# EAGLE board 1_axis_stepper_driver_teensy v71 (EAGLE 9.7.0)
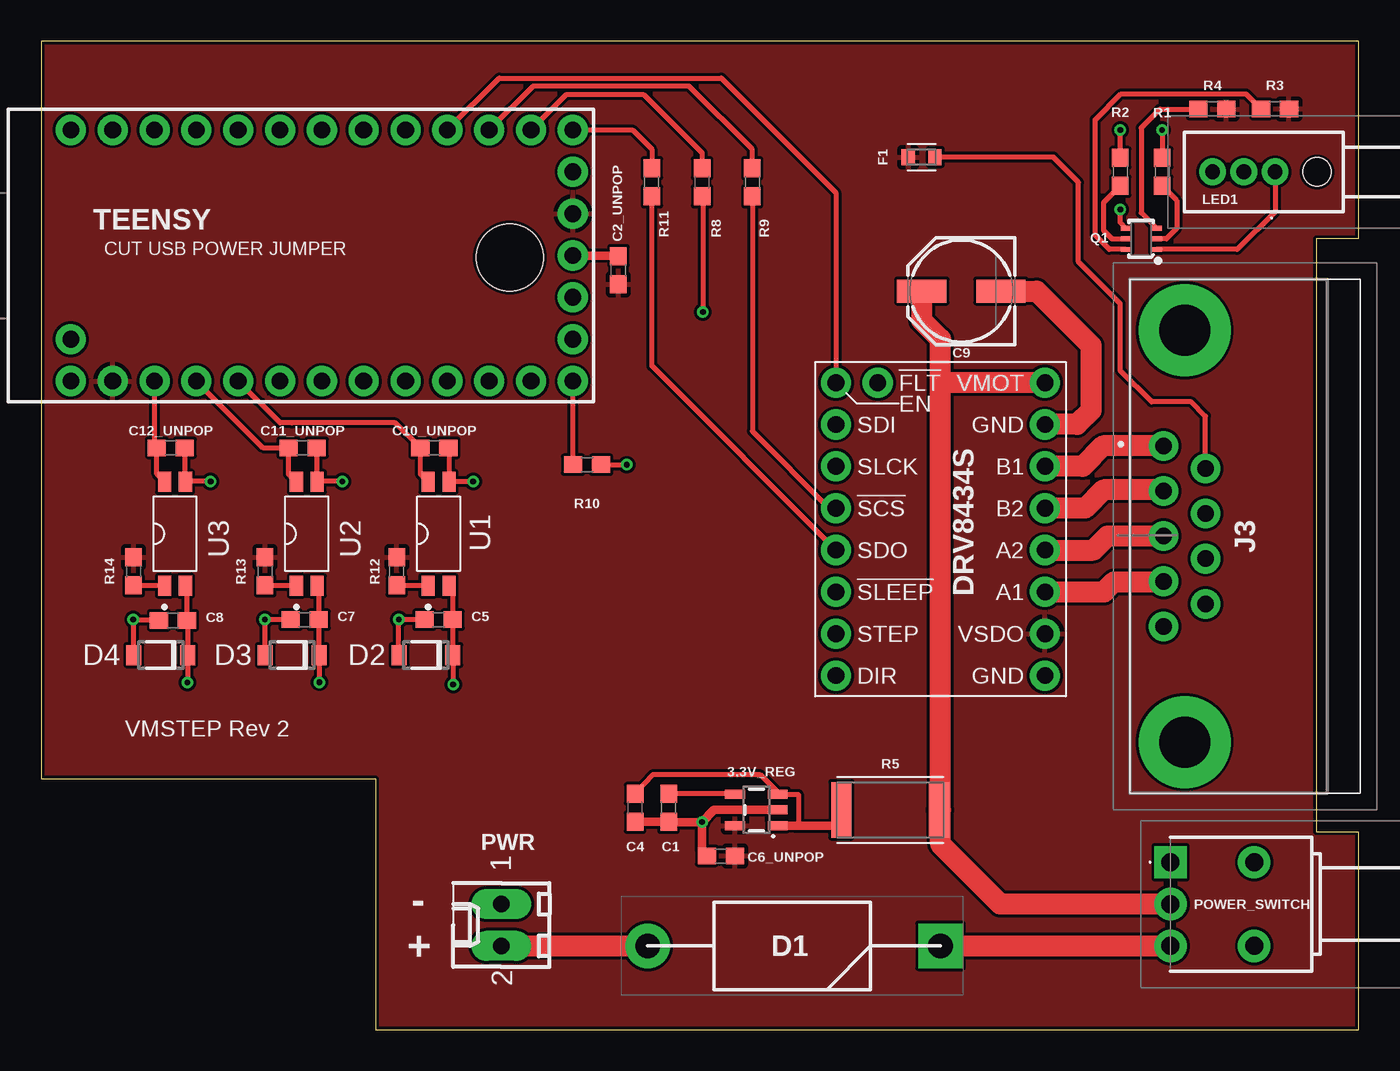
[diagram p0: board, top side]
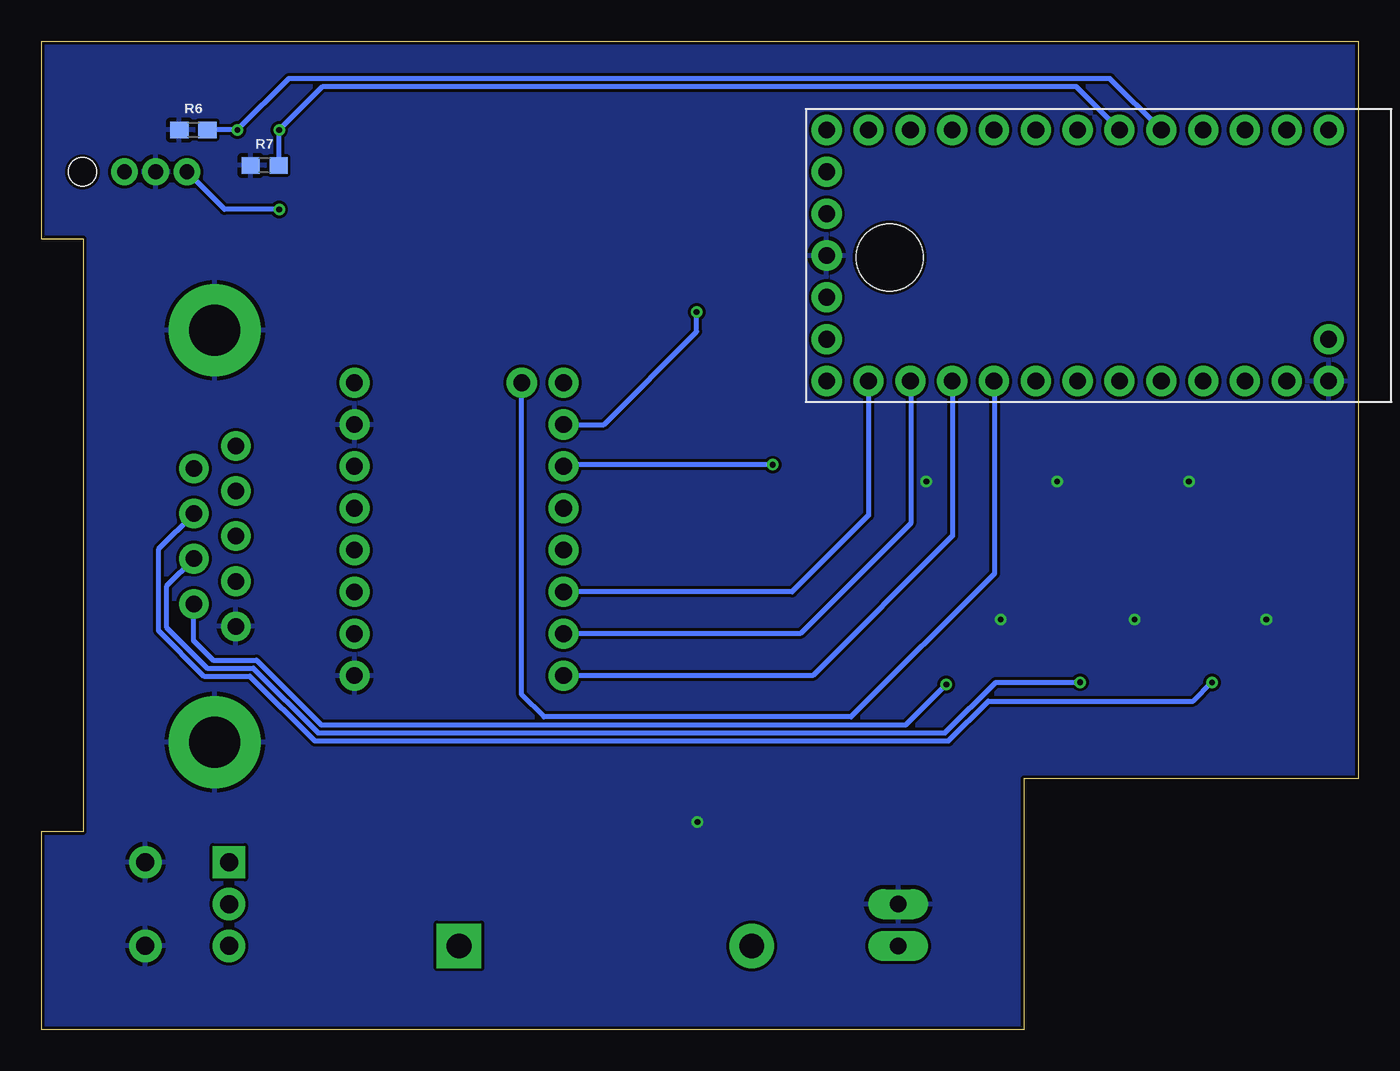
[diagram p1: board, bottom side, seen from below]

Size 79.98 x 60 mm. Coordinates in mm from the lower left corner, seen from the top.
Outline: 0,60 0,15.24 20.32,15.24 20.32,0 79.98,0 79.98,12 77.44,12 77.44,48 79.98,48 79.98,60 0,60
Copper layers (1*16): Top 0.035mm / dielectric 1.6mm / Bottom 0.035mm
Design rules "jlcpcb-2layers": minimum track width 5mil, minimum drill 0.3mm, track to track 5mil, track to pad 5mil, pad to pad 5mil, via to via 5mil, smd to smd 5mil, copper to edge 0.2mm, drill to drill 6mil, minimum pad ring 10mil, minimum via ring 3mil, stop-mask expansion 4mil, vias tented up to drill 0mil, thermal gap 10mil
Net classes: 0 default: clearance 0.178 mm; 1 Power: width 0.305 mm, clearance 0.406 mm; 2 Logic Power: clearance 0.178 mm
Holes 4.06 mm at 28.45,46.86

## Footprints (pad centres in the part's own frame; a part is rotated, then mirrored left to right if it is on the bottom)
SOT23-5 = smd 0.55 x 1.2: 1 -0.95,-1.3; 2 0,-1.3; 3 0.95,-1.3; 4 0.95,1.3; 5 -0.95,1.3
0603 = smd 1.1 x 1: 1 -0.85,0; 2 0.85,0
PANASONIC_D = smd 3 x 1.4: + 2.4,0; - -2.4,0
DIOAD3070W130L950D530 = drill 1.5 pad 2.25 square: 1 0,0 | drill 1.5 pad 2.25: 2 17.78,0
SOD123FL = smd 0.91 x 1.22: A 1.625,0; C -1.625,0
DRV8434S = drill 1.016: 1 -6.35,8.89; 2 -6.35,6.35; 3 -6.35,3.81; 4 -6.35,1.27; 5 -6.35,-1.27; 6 -6.35,-3.81; 7 -6.35,-6.35; 8 -6.35,-8.89; 9 6.35,-8.89; 10 6.35,-6.35; 11 6.35,-3.81; 12 6.35,-1.27; 13 6.35,1.27; 14 6.35,3.81; 15 6.35,6.35; 16 6.35,8.89; 17 -3.81,8.89
FUSC1608X60N = smd 0.799 x 0.974: 1 -0.815,0; 2 0.815,0
09661526615 = drill 1 pad 1.5: 1 0,0; 2 -2.74,0; 3 -5.48,0; 4 -8.22,0; 5 -10.96,0; 6 -1.37,-2.54; 7 -4.11,-2.54; 8 -6.85,-2.54; 9 -9.59,-2.54 | drill 3.1 pad 4.65: MH1 7.02,-1.27; MH2 -17.98,-1.27
WP42WUMEGW = drill 0.9 pad 1.4: 1 0,0; 2 -1.9,0; 3 -3.8,0 | hole 1.7: 2.54,0
200MSP1T2B2M6RE = drill 1.09 pad 1.635 square: 1 0,0 | drill 1.09 pad 1.635: 2 0,2.54; 3 0,5.08; MH1 -5.08,0; MH2 -5.08,5.08
6410-02 = drill 1.016 long: 1 1.27,0; 2 -1.27,0
SC70-6 = smd 0.3 x 0.66: 1 -0.65,-0.92; 2 0,-0.92; 3 0.65,-0.92; 4 0.65,0.92; 5 0,0.92; 6 -0.65,0.92
RESC6332X71 = smd 1.231 x 3.37: 1 -2.97,0; 2 2.97,0
TEENSY4.0_MIRROR = drill 1.016 pad 1.676: 0 7.62,13.97; 1 7.62,11.43; 2 7.62,8.89; 3 7.62,6.35; 3.3V 2.54,-16.51; 3.3V1 -7.62,11.43; 4 7.62,3.81; 5 7.62,1.27; 6 7.62,-1.27; 7 7.62,-3.81; 8 7.62,-6.35; 9 7.62,-8.89; 10 7.62,-11.43; 11 7.62,-13.97; 12 7.62,-16.51; 13 -7.62,-16.51; 14 -7.62,-13.97; 15 -7.62,-11.43; 16 -7.62,-8.89; 17 -7.62,-6.35; 18 -7.62,-3.81; 19 -7.62,-1.27; 20 -7.62,1.27; 21 -7.62,3.81; 22 -7.62,6.35; 23 -7.62,8.89; GND 0,-16.51; GND2 -7.62,13.97; ON-OFF -5.08,-16.51; PROG -2.54,-16.51; VBAT 5.08,-16.51; VUSB -5.08,13.97
TLP291(GR-TP,SE = smd 1.2 x 0.8: 1 -3.15,0.635; 2 -3.15,-0.635; 3 3.15,-0.635; 4 3.15,0.635

## Placement (x,y rotation side)
3.3V_REG  SPX3819M5_3_3  [SOT23-5]  43.43,13.34 90 top
C1  0.01uf  [0603]  38.1,13.46 270 top
C2_UNPOP  0.1uF  [0603]  35.05,46.1 90 top
C4  0.1uF  [0603]  36.07,13.46 270 top
C5  0.1uF  [0603]  24.13,24.89 180 top
C6_UNPOP  4.7uF  [0603]  41.27,10.54 180 top
C7  0.1uF  [0603]  16,24.89 180 top
C8  0.1uF  [0603]  8,24.84 180 top
C9  47UF-POLAR  [PANASONIC_D]  55.88,44.83 180 top
C10_UNPOP  0.1uF  [0603]  23.88,35.31 0 top
C11_UNPOP  0.1uF  [0603]  15.88,35.31 0 top
C12_UNPOP  0.1uF  [0603]  7.87,35.31 0 top
D1  1N5822  [DIOAD3070W130L950D530]  54.61,5.08 180 top
D2  SMF3.3  [SOD123FL]  23.37,22.73 180 top
D3  SMF3.3  [SOD123FL]  15.24,22.73 180 top
D4  SMF3.3  [SOD123FL]  7.26,22.73 180 top
DRV8434S  3766-DRV8434S  [DRV8434S]  54.61,30.38 0 top
F1  500  [FUSC1608X60N]  53.47,52.96 180 top
J3  09661526615  [09661526615]  68.17,35.43 90 top
LED1  WP42WUM_EGW  [WP42WUMEGW]  74.93,52.07 0 top
POWER_SWITCH  200MSP1T2B2M6RE  [200MSP1T2B2M6RE]  68.58,10.16 180 top
PWR  22-27-2021-02  [6410-02]  27.94,6.35 90 top
Q1  [SC70-6]  66.8,48.01 90 top
R1  10k  [0603]  68.07,52.07 270 top
R2  10k  [0603]  65.53,52.07 270 top
R3  220  [0603]  74.92,55.89 0 top
R4  220  [0603]  71.12,55.88 0 top
R5  68  [RESC6332X71]  51.56,13.34 180 top
R6  100k  [0603]  70.74,54.61 0 bottom
R7  100k  [0603]  66.42,52.45 0 bottom
R8  68  [0603]  40.13,51.44 270 top
R9  68  [0603]  43.18,51.44 270 top
R10  68  [0603]  33.15,34.29 180 top
R11  68  [0603]  37.08,51.44 90 top
R12  220  [0603]  21.59,27.81 270 top
R13  220  [0603]  13.59,27.81 270 top
R14  220  [0603]  5.61,27.81 270 top
TEENSY  TEENSY4.0TEENSY4.0_MIRROR  [TEENSY4.0_MIRROR]  15.77,46.99 90 top
U1  TLP291(GR-TP,SE  [TLP291(GR-TP,SE]  24.13,30.1 90 top
U2  TLP291(GR-TP,SE  [TLP291(GR-TP,SE]  16.13,30.1 90 top
U3  TLP291(GR-TP,SE  [TLP291(GR-TP,SE]  8.13,30.1 90 top

## Library data of the parts
3.3V_REG = SparkFun-IC-Power; PROD_ID: VREG-13321
C1 C2_UNPOP C4 C5 C7 C8 C10_UNPOP C11_UNPOP C12_UNPOP = SparkFun-Capacitors; PROD_ID: CAP-08390
C6_UNPOP = SparkFun-Capacitors; PROD_ID: CAP-14106
C9 = SparkFun-Capacitors; PROD_ID: CAP-10547
D1 = 1N5822; DESCRIPTION: Schottky Diodes; HEIGHT: mm; MANUFACTURER_NAME: STMicroelectronics; MANUFACTURER_PART_NUMBER: 1N5822; MOUSER_PART_NUMBER: 511-1N5822; MOUSER_PRICE-STOCK: https://www.mouser.co.uk/ProductDetail/STMicroelectronics/1N5822?qs=JV7lzlMm3yJ50hlrGV6%252BnQ%3D%3D
D2-D4 = diode
DRV8434S = pololu-stepper-driver
F1 = Circuit-Protection; CATEGORY: Circuit-Protection; SUB-CATEGORY: Fuse
J3 = 09661526615; DESCRIPTION: D-Sub 9pin female low profile angled, 2.54mm pitch, stamped, with board locks, M3, PL2; HEIGHT: 12.5mm; MANUFACTURER_NAME: HARTING; MANUFACTURER_PART_NUMBER: 09661526615; MOUSER_PART_NUMBER: 617-09661526615; MOUSER_PRICE-STOCK: https://www.mouser.co.uk/ProductDetail/HARTING/09661526615?qs=vMzbrHvTwPGeGx6%252Be%2Fu2sw%3D%3D
LED1 = WP42WUM_EGW; DESCRIPTION: LED Circuit Board Indicators Red Grn 625 568nm White Diffused; HEIGHT: 7.36mm; MANUFACTURER_NAME: Kingbright; MANUFACTURER_PART_NUMBER: WP42WUM/EGW; MOUSER_PART_NUMBER: 604-WP42WUM/EGW; MOUSER_PRICE-STOCK: https://www.mouser.co.uk/ProductDetail/Kingbright/WP42WUM-EGW?qs=58z0TXQGVSSWjxfnBzIG6A%3D%3D
POWER_SWITCH = 200MSP1T2B2M6RE; DESCRIPTION: TOGGLE, 0.4VA, 20VAC/VDC SPDT, On-On Through Hole, Right Angle; HEIGHT: 6.35mm; MANUFACTURER_NAME: E-Switch; MANUFACTURER_PART_NUMBER: 200MSP1T2B2M6RE; MOUSER_PART_NUMBER: 612-200-A2262; MOUSER_PRICE-STOCK: https://www.mouser.co.uk/ProductDetail/E-Switch/200MSP1T2B2M6RE?qs=7Bi7Dg8SEnwpN43jZS7hJQ%3D%3D
PWR = con-molex; MF: MOLEX; OC_FARNELL: unknown; OC_NEWARK: unknown
Q1 = SparkFun-DiscreteSemi; PROD_ID: TRANS-13337
R1 R2 R6-R14 = SparkFun-Resistors; PROD_ID: RES-00824
R3 R4 = SparkFun-Resistors; PROD_ID: RES-07861
R5 = Resistor; CATEGORY: Resistor; SUB-CATEGORY: Fixed
TEENSY = SparkFun-Boards
U1-U3 = OPTOISOLATOR; CREATED_BY: PCBLayout.com; DIGIKEY_PART_NUMBER: TLP291(GR-TPSECT-ND; MANUFACTURER: Toshiba Semiconductor and Storage; MPN: TLP291(GR-TP,SE; PACKAGE: 4-SO

## Nets
5V [Logic Power]: 3.3V_REG.1 3.3V_REG.3 C4.1 R5.2
+12V [Power]: C9.+ DRV8434S.16 POWER_SWITCH.2 R5.1
A1 [Power]: DRV8434S.11 J3.4
A2 [Power]: DRV8434S.12 J3.3
B1 [Power]: DRV8434S.14 J3.1
B2 [Power]: DRV8434S.13 J3.2
DCIN [Power]: D1.2 PWR.2
DCSAFE [Power]: D1.1 POWER_SWITCH.3
DIR: DRV8434S.8 TEENSY.16
ENABLE: DRV8434S.1 TEENSY.9
FAULT: DRV8434S.17 TEENSY.17
GND [Logic Power]: 3.3V_REG.2 C1.2 C2_UNPOP.2 C4.2 C5.2 C6_UNPOP.2 C7.2 C8.2 C9.- C10_UNPOP.2 C11_UNPOP.2 C12_UNPOP.2 D2.A D3.A D4.A DRV8434S.9 DRV8434S.15 J3.5 J3.MH1 J3.MH2 LED1.2 POWER_SWITCH.MH1 POWER_SWITCH.MH2 PWR.1 R6.1 R7.1 TEENSY.GND TEENSY.GND2 U1.3 U2.3 U3.3
HOME: C10_UNPOP.1 TEENSY.21 U1.4
HOME_INPUT: C5.1 D2.C J3.9 U1.2
LED_G: R2.1 R7.2 TEENSY.5
LED_R: R1.1 R6.2 TEENSY.4
LIM1: C12_UNPOP.1 TEENSY.23 U3.4
LIM1_INPUT: C8.1 D4.C J3.7 U3.2
LIM2: C11_UNPOP.1 TEENSY.22 U2.4
LIM2_INPUT: C7.1 D3.C J3.8 U2.2
LOGIC [Logic Power]: 3.3V_REG.5 C2_UNPOP.1 C6_UNPOP.1 DRV8434S.10 F1.2 R3.2 R4.2 R12.1 R13.1 R14.1 TEENSY.3.3V TEENSY.3.3V1
MISO: R11.2 TEENSY.12
MOSI: DRV8434S.2 R8.2
N$1: Q1.6 R3.1
N$2: LED1.1 Q1.1
N$3: Q1.2 R1.2
N$4: Q1.5 R2.2
N$5: Q1.3 R4.1
N$6: LED1.3 Q1.4
N$7 [Logic Power]: F1.1 J3.6
N$8: 3.3V_REG.4 C1.1
N$9: R8.1 TEENSY.11
N$10: R9.1 TEENSY.10
N$11: R10.2 TEENSY.13
N$12: DRV8434S.5 R11.1
N$13: R12.2 U1.1
N$14: R13.2 U2.1
N$15: R14.2 U3.1
SCLK: DRV8434S.3 R10.1
SCS: DRV8434S.4 R9.2
SLEEP: DRV8434S.6 TEENSY.14
STEP: DRV8434S.7 TEENSY.15
VBAT: TEENSY.VBAT
VUSB: TEENSY.VUSB

## Tracks (layer width: path | path; a pad name or v marks a point on that pad's centre or on a via)
5V
  Top 0.305: C4.1 37.18,15.5 43.65,15.5 44.73,14.41 3.3V_REG.3 45.97,14.29 45.97,12.38 | 48.59,12.38 R5.2
  Top 0.508: 3.3V_REG.1 45.72,12.38 45.97,12.38 48.59,12.38
+12V
  Top 1.27: DRV8434S.16 54.71,39.27 54.61,39.37 | 54.61,13.34 54.61,11.26 58.24,7.62 POWER_SWITCH.2 | 54.61,13.34 54.61,39.37 | 54.61,39.37 54.61,41.91 53.48,43.04 C9.+ | R5.1 54.61,13.34
A1
  Top 1.27: DRV8434S.11 64.54,26.57 65.15,27.18 68.13,27.18 J3.4
A2
  Top 1.27: DRV8434S.12 63.91,29.11 64.77,29.97 68.15,29.97 J3.3
B1
  Top 1.27: J3.1 64.49,35.43 63.24,34.19 DRV8434S.14
B2
  Top 1.27: DRV8434S.13 63.4,31.65 64.52,32.77 68.09,32.77 J3.2
DCIN
  Top 1.27: PWR.2 D1.2
DCSAFE
  Top 1.27: D1.1 POWER_SWITCH.3
DIR
  Bottom 0.305: DRV8434S.8 33.12,21.49 24.64,29.97 24.64,39.34 TEENSY.16
ENABLE
  Top 0.305: DRV8434S.1 48.26,50.8 41.3,57.76 27.81,57.76 TEENSY.9
FAULT
  Bottom 0.305: TEENSY.17 22.1,39.34 22.1,27.69 30.81,18.98 49.46,18.98 50.8,20.32 DRV8434S.17
GND  (via drill 0.35 pad 0.7)
  Top 0.152: C1.2 38.11,12.6
  Top 0.305: C10_UNPOP.2 24.77,35.27 U1.3 26.21,33.25 v26.23,33.27 | C11_UNPOP.2 16.73,33.29 U2.3 16.79,33.27 v18.29,33.27 | C12_UNPOP.2 8.72,33.29 U3.3 8.79,33.27 v10.29,33.27 | C5.2 v21.72,24.89 21.72,22.76 D2.A | D3.A 13.62,24.87 | 13.62,24.87 v13.59,24.89 | C7.2 13.64,24.89 13.62,24.87 | D4.A 5.63,24.85 | 5.63,24.85 v5.59,24.89 | C8.2 5.63,24.85 | C6_UNPOP.2 40.13,10.83
  Top 0.508: C4.2 C1.2 | 38.11,12.6 v40.13,12.6 | 3.3V_REG.2 40.87,13.34 v40.13,12.6 | 40.13,10.83 v40.13,12.6 | C2_UNPOP.2 35.01,46.99 TEENSY.GND
  Top 1.27: DRV8434S.15 62.9,36.73 63.76,37.59 63.76,41.52 60.45,44.83 C9.-
  pour Bottom: -1.12,-1.12 81.13,-1.12 81.13,60.81 -1.12,60.81
HOME
  Top 0.305: U1.4 23.03,33.72 C10_UNPOP.1 21.5,36.83 15.24,36.83 14.5,36.83 TEENSY.21
HOME_INPUT  (via drill 0.35 pad 0.7)
  Top 0.305: U1.2 24.98,26.73 C5.1 24.99,24.88 D2.C 25.02,22.71 v25.02,20.95
  Bottom 0.305: J3.9 70.74,25.81 70.74,23.62 69.55,22.43 66.91,22.43 62.97,18.49 27.48,18.49 v25.02,20.95
LED_G  (via drill 0.35 pad 0.7)
  Top 0.305: R2.1 v65.53,54.61
  Bottom 0.152: v65.53,54.61 65.57,54.57
  Bottom 0.305: 65.57,54.57 R7.2 | v65.53,54.61 62.89,57.25 17.14,57.25 TEENSY.5
LED_R  (via drill 0.35 pad 0.7)
  Top 0.305: v68.07,54.61 R1.1
  Bottom 0.305: R6.2 v68.07,54.61 64.95,57.73 15.09,57.73 TEENSY.4
LIM1
  Top 0.305: U3.4 7.02,33.72 C12_UNPOP.1 6.88,35.45 TEENSY.23
LIM1_INPUT  (via drill 0.35 pad 0.7)
  Top 0.305: U3.2 8.85,26.86 C8.1 8.88,24.81 D4.C v8.88,21.08 | v8.88,21.08
  Bottom 0.305: v8.88,21.08 10.02,19.94 22.48,19.94 24.89,17.53 63.37,17.53 67.31,21.46 70.1,21.46 72.87,24.23 72.87,29.16 J3.7
LIM2
  Top 0.305: TEENSY.22 13.46,35.33 15,35.33 C11_UNPOP.1 15.03,33.72 U2.4
LIM2_INPUT  (via drill 0.35 pad 0.7)
  Top 0.305: U2.2 16.85,26.86 C7.1 16.85,22.75 D3.C 16.86,21.11 v16.89,21.08
  Bottom 0.305: J3.8 72.39,26.9 72.39,24.43 69.9,21.95 67.11,21.95 63.17,18.01 25.09,18.01 22.02,21.08 v16.89,21.08
LOGIC
  Top 0.305: C6_UNPOP.1 42.39,10.8
  pour Top: -1.12,-1.12 81.13,-1.12 81.13,60.81 -1.12,60.81
MISO
  Top 0.305: TEENSY.12 35.9,54.61 37.08,53.43 R11.2
MOSI  (via drill 0.35 pad 0.7)
  Top 0.305: R8.2 40.19,50.53 v40.19,43.56
  Bottom 0.305: DRV8434S.2 45.82,36.73 40.19,42.36 v40.19,43.56
N$1
  Top 0.305: Q1.6 64.86,47.36 64.01,48.21 64.01,55.24 65.56,56.8 73.16,56.8 R3.1
N$2
  Top 0.305: Q1.1 72.63,47.36 74.93,49.66 LED1.1
N$3
  Top 0.305: Q1.2 68.33,48.01 68.96,48.64 68.96,50.33 R1.2
N$4
  Top 0.305: Q1.5 65.02,48.01 64.52,48.51 64.52,50.2 R2.2
N$5
  Top 0.305: Q1.3 66.8,49.58 66.8,54.74 67.94,55.88 R4.1
N$6  (via drill 0.35 pad 0.7)
  Top 0.305: Q1.4 65.53,49.01 v65.53,49.78
  Bottom 0.305: v65.53,49.78 68.84,49.78 LED1.3
N$7
  Top 0.305: J3.6 70.71,37.24 69.85,38.1 67.44,38.1 65.53,40.01 65.53,44.07 62.99,46.61 62.99,51.44 61.47,52.96 F1.1
N$8
  Top 0.152: 3.3V_REG.4 42.11,14.31
  Top 0.305: 42.11,14.31 C1.1
N$9
  Top 0.305: TEENSY.11 31.9,56.77 36.58,56.77 40.13,53.21 R8.1
N$10
  Top 0.305: TEENSY.10 29.87,57.28 39.33,57.28 43.18,53.43 R9.1
N$11
  Top 0.305: R10.2 32.28,34.3 TEENSY.13
N$12
  Top 0.305: DRV8434S.5 37.08,40.29 R11.1
N$13
  Top 0.305: U1.1 21.6,26.95 R12.2
N$14
  Top 0.305: U2.1 13.6,26.95 R13.2
N$15
  Top 0.305: U3.1 R14.2
SCLK  (via drill 0.35 pad 0.7)
  Top 0.305: R10.1 v35.56,34.29
  Bottom 0.305: v35.56,34.29 48.16,34.29 DRV8434S.3
SCS
  Top 0.305: DRV8434S.4 47.85,31.65 43.18,36.32 R9.2
SLEEP
  Bottom 0.305: DRV8434S.6 34.39,26.57 29.74,31.22 TEENSY.14
STEP
  Bottom 0.305: TEENSY.15 27.18,39.34 27.18,30.73 33.88,24.03 DRV8434S.7
(copper drawn outside any net)
  shapes: Top area x1

## Text on the board
tPlace: CUT USB POWER JUMPER | VMSTEP Rev 2 | - | +